# Altium PCB Copy of PCB1.PcbDoc
Units mil, origin at the board's own origin, x right, y up, seen from the top; angles counter-clockwise.
Board outline 3695 x 2500 mil, 4 copper layers (Top Layer, Mid Layer 1, Mid Layer 2, Bottom Layer), stack 64.961 mil thick; 77 components, 56 nets, 298 pads, 141 vias.
Unrouted connection lines stored in the file: 1.
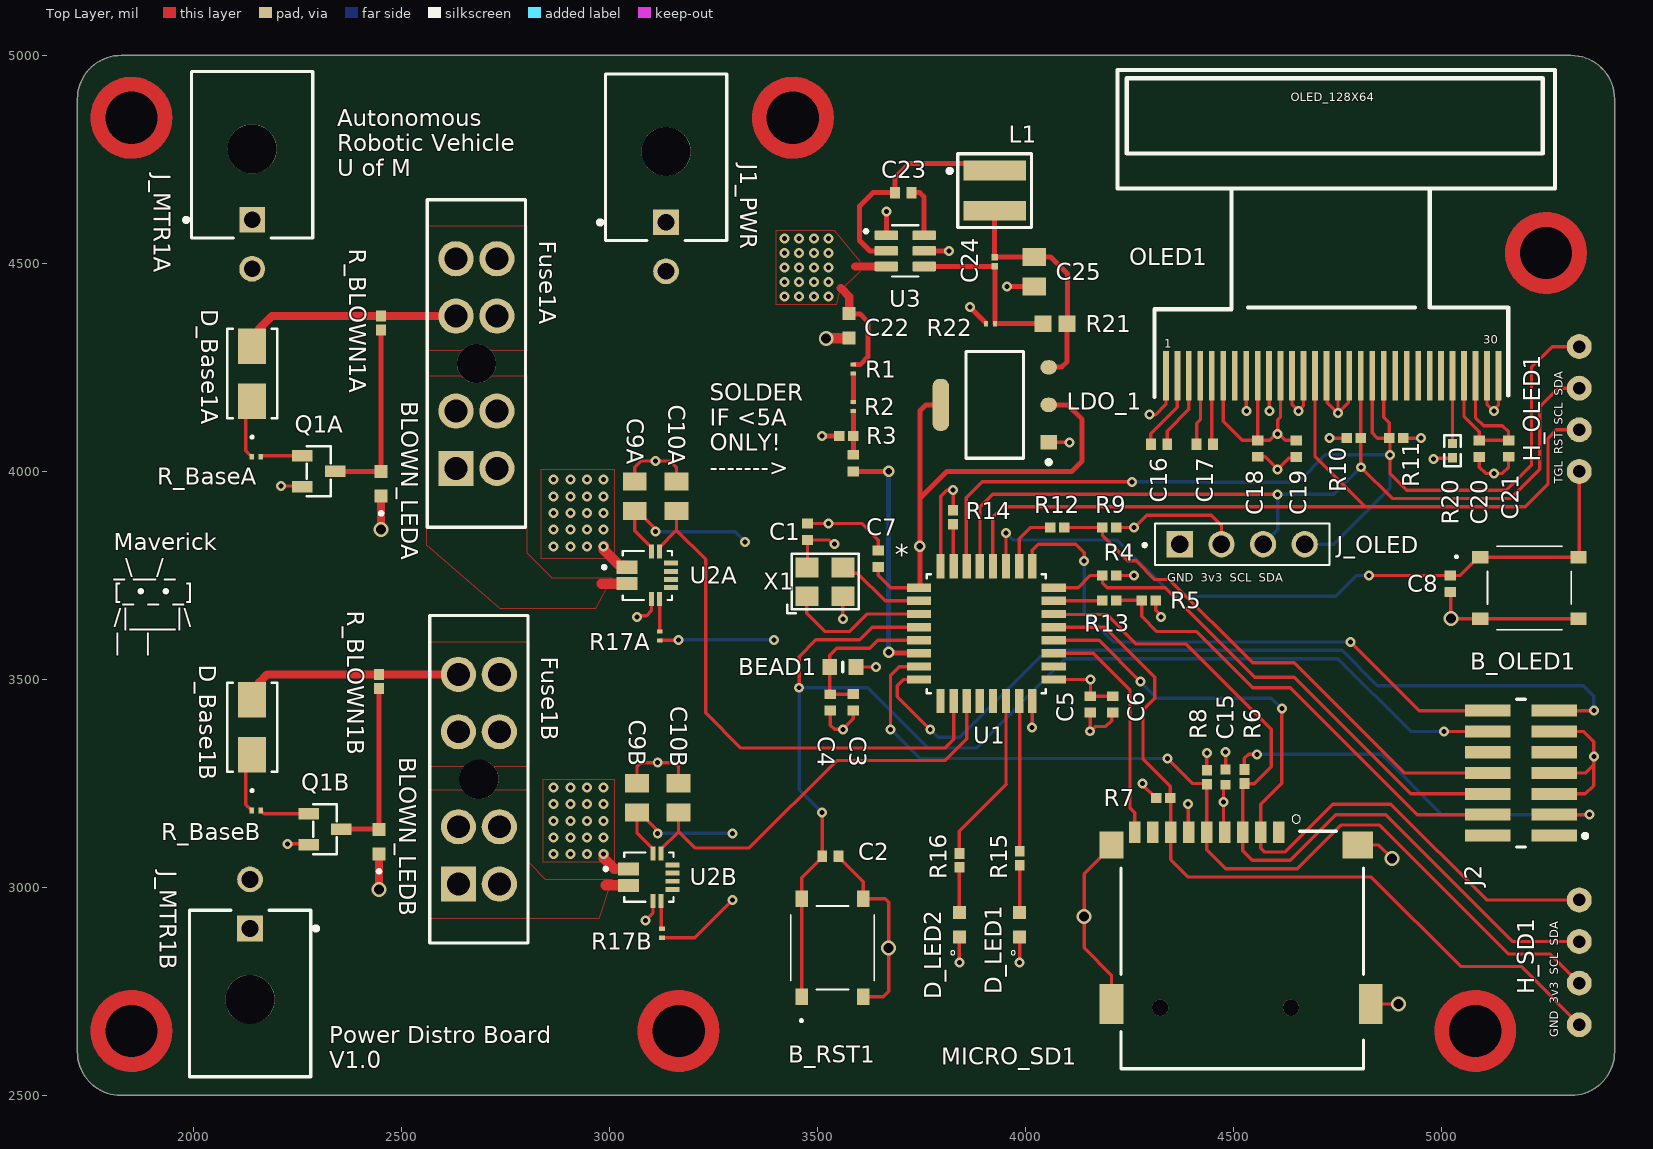
[diagram p0: Top Layer view]
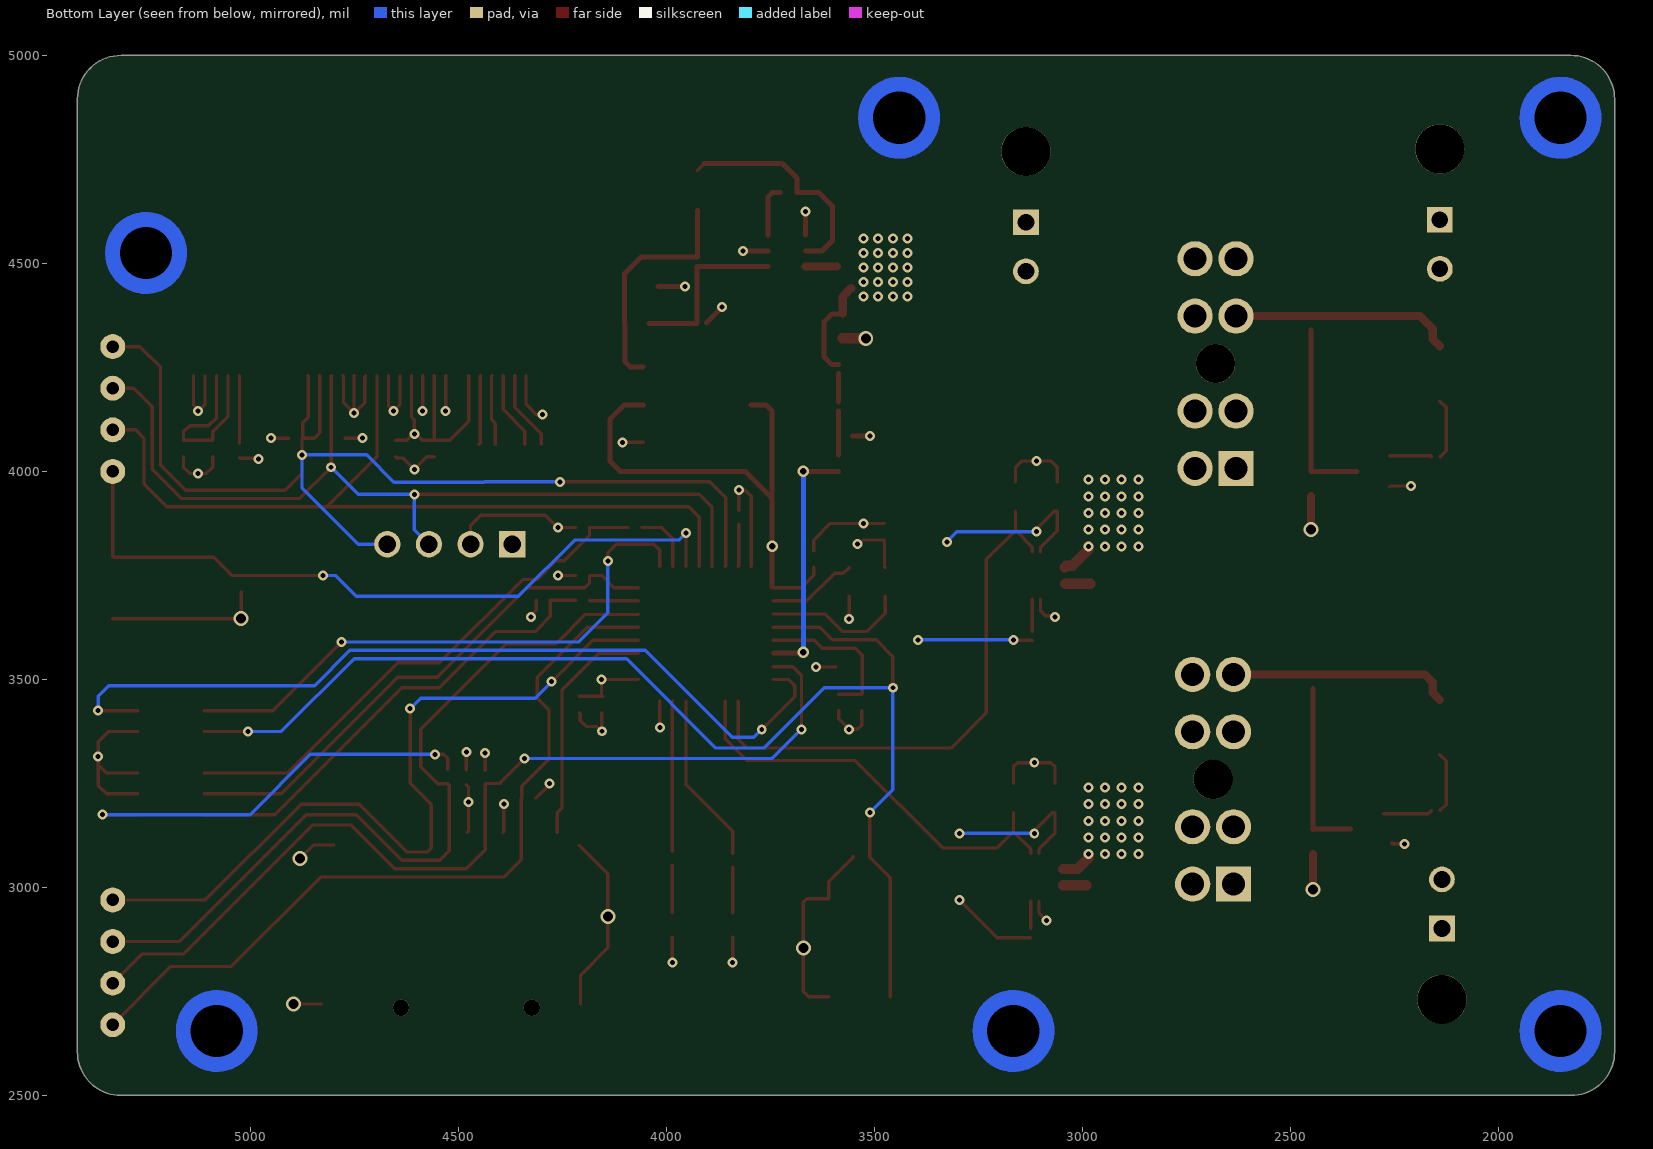
[diagram p1: Bottom Layer view, seen from below]
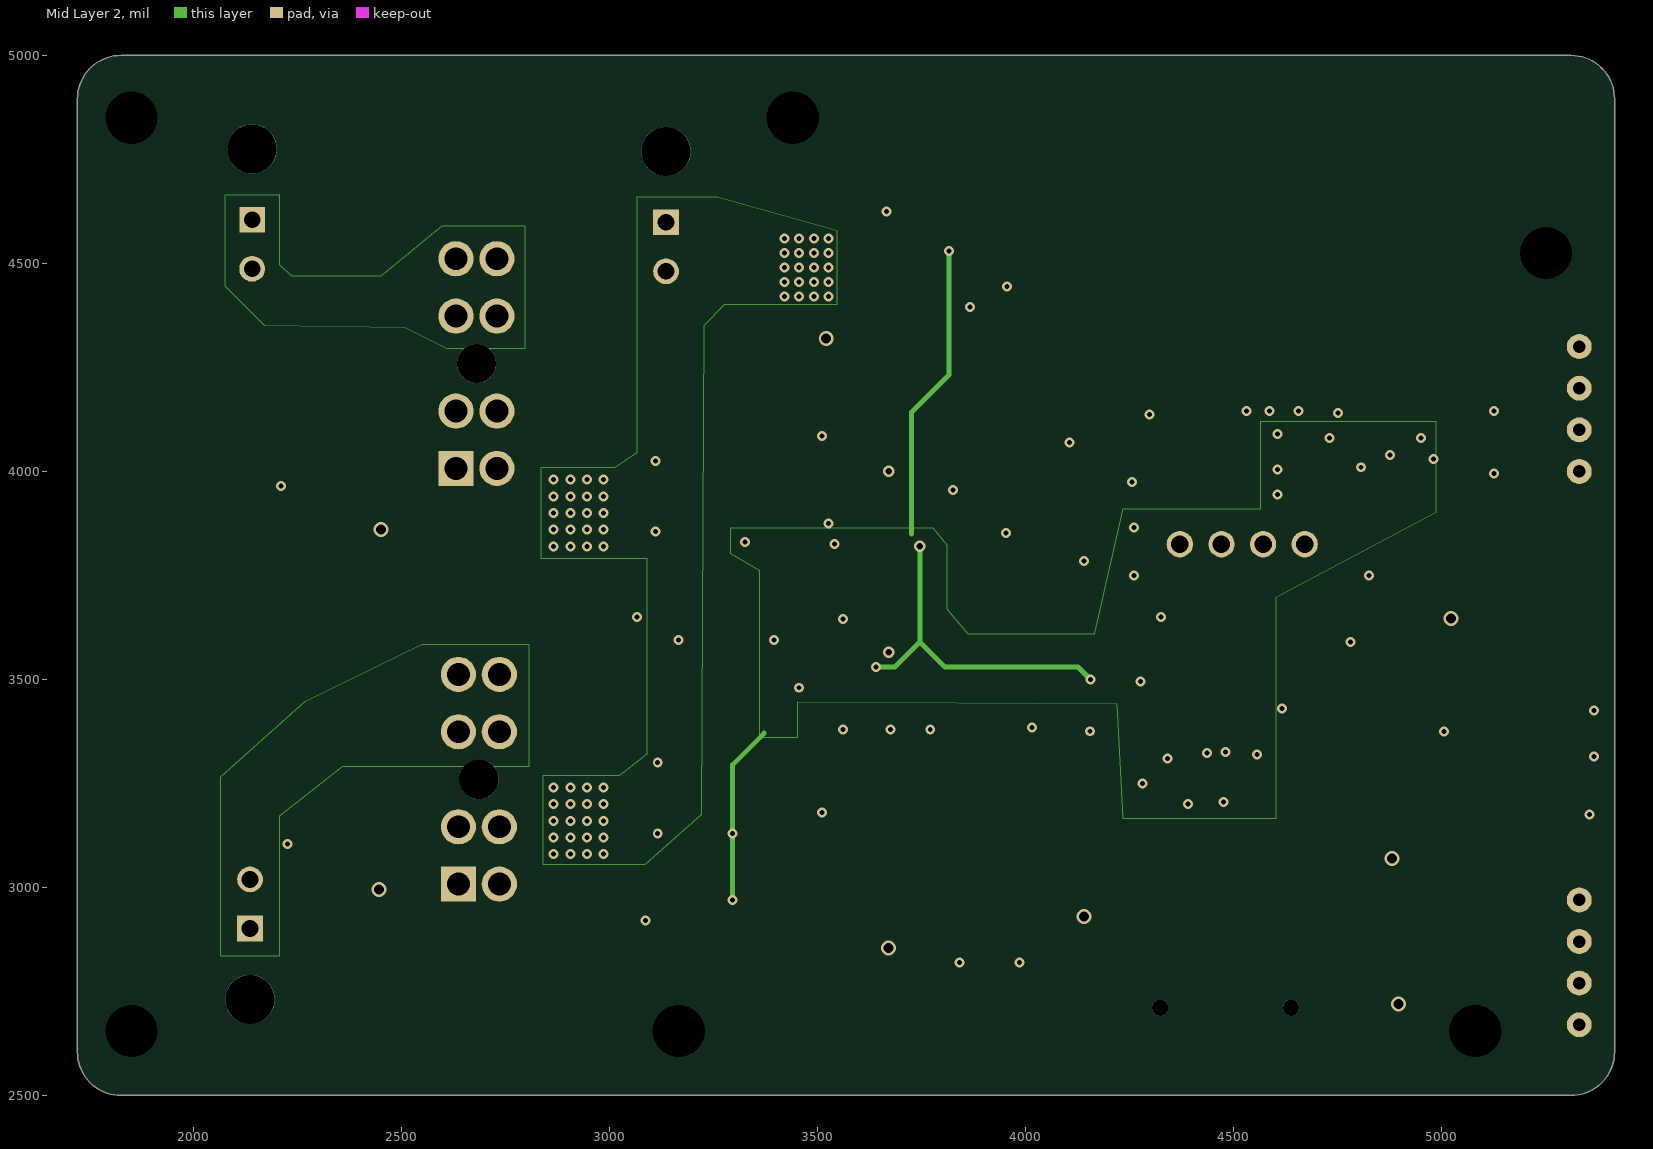
[diagram p2: Mid Layer 2]

## Layer stack, top to bottom
Top Solder: solder mask 0.5, Solder Resist, Dk 3.8
Top Layer: signal copper 2.9528
Dielectric 1: prepreg 3.937, 2313, Dk 4.05
Mid Layer 1: signal copper 0.689
Core: core 49.8031, FR-4, Dk 4.5
Mid Layer 2: signal copper 0.689
Dielectric 2: prepreg 3.937, 2313, Dk 4.05
Bottom Layer: signal copper 2.9528
Bottom Solder: solder mask 0.5, Solder Resist, Dk 3.8

## Board outline
1825,2500 cw(c1825,2605) 1720,2605 1720,4895 cw(c1825,4895) 1825,5000 5310,5000 cw(c5310,4895) 5415,4895 5415,2605 cw(c5310,2605) 5310,2500

## Design rules (kind name [scope] priority, off if disabled: settings)
AssemblyTestPointUsage [All] p0: scope1count=1 scope1_0_kind=Board scope1_0_value=Board scope2count=1 scope2_0_kind=Board scope2_0_value=Board commentlength=0
AssemblyTestpoint [All] p0: scope1count=1 scope1_0_kind=Board scope1_0_value=Board scope2count=1 scope2_0_kind=Board scope2_0_value=Board commentlength=0
BoardOutlineClearance [All] p0: scope1count=1 scope1_0_kind=Board scope1_0_value=Board scope2count=1 scope2_0_kind=Board scope2_0_value=Board commentlength=0 gap=11.81
BoardOutlineClearance [All] p1: gap=11.81 ignorepadtopadclearanceinfootprint=FALSE except(15.75: Arc-SplitBarrior Arc-SplitContinuation Track-SplitBarrior Track-SplitContinuation SMDPad-SplitBarrior SMDPad-SplitContinuation THPad-SplitBarrior THPad-SplitContinuation Via-SplitBarrior Via-SplitContinuation Fill-SplitBarrior Fill-SplitContinuation Poly-SplitBarrior Poly-SplitContinuation Region-SplitBarrior Region-SplitContinuation Text-SplitBarrior Text-SplitContinuation)
Clearance [All] p0: scope1count=1 scope1_0_kind=Board scope1_0_value=Board scope2count=1 scope2_0_kind=Board scope2_0_value=Board commentlength=0 gap=10
Clearance "Clearance Top Layer" [All] p0: scope1count=1 scope1_0_kind=Layer scope1_0_value=TOP scope2count=1 scope2_0_kind=Board scope2_0_value=Board commentlength=0 gap=8
Clearance "Clearance Bottom Layer" [All] p0: scope1count=1 scope1_0_kind=Layer scope1_0_value=BOTTOM scope2count=1 scope2_0_kind=Board scope2_0_value=Board commentlength=0 gap=8
Clearance "Clearance Same Nets" [All] p0: scope1count=1 scope1_0_kind=Board scope1_0_value=Board scope2count=1 scope2_0_kind=Board scope2_0_value=Board commentlength=0 gap=7.87
Clearance "Clearance Different Nets" [All] p0: scope1count=1 scope1_0_kind=Board scope1_0_value=Board scope2count=1 scope2_0_kind=Board scope2_0_value=Board commentlength=0 gap=7.87
Clearance [All] p1: gap=10 ignorepadtopadclearanceinfootprint=TRUE
Clearance "Clearance Different Nets" [All] p2: gap=7.87 ignorepadtopadclearanceinfootprint=FALSE except(3.5: Arc-Arc Arc-Track Arc-SMDPad Track-Track Track-SMDPad; 5: SMDPad-SMDPad SMDPad-Via THPad-Via Via-Via; 10: Arc-Via Arc-Text Track-Via Track-Text SMDPad-Text THPad-Text Via-Text Fill-Text Poly-Text Region-Text Text-Text; 19.68: THPad-THPad Via-Hole)
Clearance "Clearance Same Nets" [All] p3: gap=7.87 ignorepadtopadclearanceinfootprint=FALSE except(3.5: Arc-Arc Arc-Track Arc-SMDPad Track-Track Track-SMDPad SMDPad-SMDPad; 5: SMDPad-Via THPad-Via; 10: Arc-Via Arc-Text Track-Via Track-Text SMDPad-Text THPad-Text Via-Via Via-Text Fill-Text Poly-Text Region-Text Text-Text)
Clearance "Clearance Bottom Layer" [OnLayer('Bottom Layer')] p4: gap=8 ignorepadtopadclearanceinfootprint=TRUE except(10: Arc-Text Track-Text SMDPad-Text THPad-Text Via-Text Fill-Text Poly-Text Region-Text Text-Text)
Clearance "Clearance Top Layer" [OnLayer('Top Layer')] p5: gap=8 ignorepadtopadclearanceinfootprint=TRUE except(10: Arc-Text Track-Text SMDPad-Text THPad-Text Via-Text Fill-Text Poly-Text Region-Text Text-Text)
ComponentClearance [All] p0: scope1count=1 scope1_0_kind=Board scope1_0_value=Board scope2count=1 scope2_0_kind=Board scope2_0_value=Board commentlength=0 gap=10 collisioncheckmode=3
DiffPairsRouting [All] p0: scope1count=1 scope1_0_kind=Board scope1_0_value=Board scope2count=1 scope2_0_kind=Board scope2_0_value=Board commentlength=0
FabricationTestPointUsage [All] p0: scope1count=1 scope1_0_kind=Board scope1_0_value=Board scope2count=1 scope2_0_kind=Board scope2_0_value=Board commentlength=0 valid=0 allowmultiple=FALSE
FabricationTestpoint [All] p0: scope1count=1 scope1_0_kind=Board scope1_0_value=Board scope2count=1 scope2_0_kind=Board scope2_0_value=Board commentlength=0 side=3 testpointundercomponent=TRUE minsize=40 maxsize=100 preferedsize=60 minholesize=0 maxholesize=40 preferedholesize=32 testpointgrid=1
FanoutControl Fanout_Default [All] p0: scope1count=1 scope1_0_kind=Board scope1_0_value=Board scope2count=1 scope2_0_kind=Board scope2_0_value=Board commentlength=30 // Fanout_Default (Default Rule)
FanoutControl Fanout_Small [All] p0 off: scope1count=1 scope1_0_kind=Board scope1_0_value=Board scope2count=1 scope2_0_kind=Board scope2_0_value=Board commentlength=84 // Protel DXP Scope 1 Expression Was: (CompPinCount < 5)   Fanout_Small (Default Rule)
FanoutControl Fanout_SOIC [All] p0 off: scope1count=1 scope1_0_kind=Board scope1_0_value=Board scope2count=1 scope2_0_kind=Board scope2_0_value=Board commentlength=71 // Protel DXP Scope 1 Expression Was: IsSOIC   Fanout_SOIC (Default Rule)
FanoutControl Fanout_LCC [All] p0 off: scope1count=1 scope1_0_kind=Board scope1_0_value=Board scope2count=1 scope2_0_kind=Board scope2_0_value=Board commentlength=69 // Protel DXP Scope 1 Expression Was: IsLCC   Fanout_LCC (Default Rule)
FanoutControl Fanout_BGA [All] p0 off: scope1count=1 scope1_0_kind=Board scope1_0_value=Board scope2count=1 scope2_0_kind=Board scope2_0_value=Board commentlength=69 // Protel DXP Scope 1 Expression Was: IsBGA   Fanout_BGA (Default Rule)
Height [All] p0: scope1count=1 scope1_0_kind=Board scope1_0_value=Board scope2count=1 scope2_0_kind=Board scope2_0_value=Board commentlength=0
HoleSize [All] p0: scope1count=1 scope1_0_kind=Board scope1_0_value=Board scope2count=1 scope2_0_kind=Board scope2_0_value=Board commentlength=0 absolutevalues=TRUE maxlimit=248.03 minlimit=7.87 maxpercent=80.000 minpercent=20.000
HoleSize [All] p1: absolutevalues=TRUE maxlimit=248.03 minlimit=7.87 maxpercent=80.000 minpercent=20.000
HoleToHoleClearance [All] p0: scope1count=1 scope1_0_kind=Board scope1_0_value=Board scope2count=1 scope2_0_kind=Board scope2_0_value=Board commentlength=0
LayerPairs [All] p0: scope1count=1 scope1_0_kind=Board scope1_0_value=Board scope2count=1 scope2_0_kind=Board scope2_0_value=Board commentlength=0 enforce=TRUE
MinimumAnnularRing [All] p0: scope1count=1 scope1_0_kind=Board scope1_0_value=Board scope2count=1 scope2_0_kind=Board scope2_0_value=Board commentlength=0 minimumring=5.12
MinimumAnnularRing [All] p1: minimumring=5.12
MinimumSolderMaskSliver [All] p0: scope1count=1 scope1_0_kind=Board scope1_0_value=Board scope2count=1 scope2_0_kind=Board scope2_0_value=Board commentlength=0
MinimumSolderMaskSliver [All] p1: minsoldermaskwidth=3.94
NetAntennae [All] p0: scope1count=1 scope1_0_kind=Board scope1_0_value=Board scope2count=1 scope2_0_kind=Board scope2_0_value=Board commentlength=0
PasteMaskExpansion [All] p0: scope1count=1 scope1_0_kind=Board scope1_0_value=Board scope2count=1 scope2_0_kind=Board scope2_0_value=Board commentlength=0 expansion=0
PlaneClearance [All] p0: scope1count=1 scope1_0_kind=Board scope1_0_value=Board scope2count=1 scope2_0_kind=Board scope2_0_value=Board commentlength=0 clearance=25
PlaneClearance [All] p1: clearance=25
PlaneConnect [All] p0: scope1count=1 scope1_0_kind=Board scope1_0_value=Board scope2count=1 scope2_0_kind=Board scope2_0_value=Board commentlength=0 planeconnectstyle=Relief reliefexpansion=20 reliefentries=4 reliefconductorwidth=10 reliefairgap=10
PolygonConnect PolygonConnect_3 [All] p0 off: scope1count=1 scope1_0_kind=Board scope1_0_value=Board scope2count=1 scope2_0_kind=Board scope2_0_value=Board commentlength=69 connectstyle=Relief reliefconductorwidth=60 reliefentries=4 polygonreliefangle="90 Angle" // Protel DXP Scope 2 Expression Was: IsNamedPolygon('GND_L02_P000')
PolygonConnect PolygonConnect_2 [All] p0 off: scope1count=1 scope1_0_kind=Board scope1_0_value=Board scope2count=1 scope2_0_kind=Board scope2_0_value=Board commentlength=429 connectstyle=Relief reliefconductorwidth=10 reliefentries=4 polygonreliefangle="90 Angle" // Protel DXP Scope 1 Expression Was: (IsNamedPolygon('26V1_L01_P003') OR IsNamedPolygon('26V1_L01_P005') OR IsNamedPolygon('26V1_L01_P006') OR IsNamedPolygon('NETD_BASE1A_2_L01_P012') OR IsNamedPolygon('NETD_BASE1B_2_L01_P011') OR IsNamedPolygon('VMOTOR1_L01_P007') OR IsNamedPolygon('VMOTOR2_L01_P010')OR
IsNamedPolygon('26V1_L03_P004')OR
IsNamedPolygon('NETD_BASE1A_2_L03_P015')OR
IsNamedPolygon('NETD_BASE1B_2_L03_P014'))
PolygonConnect [All] p0: scope1count=1 scope1_0_kind=Board scope1_0_value=Board scope2count=1 scope2_0_kind=Board scope2_0_value=Board commentlength=0 connectstyle=Relief reliefconductorwidth=10 reliefentries=4 polygonreliefangle="90 Angle"
PolygonConnect PolygonConnect_1 [All] p0 off: scope1count=1 scope1_0_kind=Board scope1_0_value=Board scope2count=1 scope2_0_kind=Board scope2_0_value=Board commentlength=163 connectstyle=Direct reliefconductorwidth=20 reliefentries=4 polygonreliefangle="90 Angle" // Protel DXP Scope 1 Expression Was: (InComponent('J_MTR1A') OR InComponent('J_MTR1B') OR InComponent('J1_PWR')OR InComponent('Fuse1A') OR InComponent('Fuse1B'))
PolygonConnect PolygonConnect_3 [(InComponent('J_MTR1A') OR InComponent('J_MTR1B') OR InComponent('J1_PWR')OR InComponent('Fuse1A') OR InComponent('Fuse1B')) vs IsNamedPolygon('GND_L02_P000')] p1: thpad.connectstyle=Relief thpad.reliefconductorwidth=60 thpad.reliefentries=4 thpad.polygonreliefangle="90 Angle" thpad.airgapwidth=25 smdpad.connectstyle=Relief smdpad.reliefconductorwidth=10 smdpad.reliefentries=4 smdpad.polygonreliefangle="90 Angle" smdpad.airgapwidth=10 via.connectstyle=Relief via.reliefconductorwidth=10 via.reliefentries=4 via.polygonreliefangle="90 Angle" via.airgapwidth=10
PolygonConnect PolygonConnect_1 [(InComponent('J_MTR1A') OR InComponent('J_MTR1B') OR InComponent('J1_PWR')OR InComponent('Fuse1A') OR InComponent('Fuse1B'))] p2: thpad.connectstyle=Direct thpad.reliefconductorwidth=20 thpad.reliefentries=4 thpad.polygonreliefangle="90 Angle" thpad.airgapwidth=10 smdpad.connectstyle=Relief smdpad.reliefconductorwidth=20 smdpad.reliefentries=4 smdpad.polygonreliefangle="90 Angle" smdpad.airgapwidth=10 via.connectstyle=Relief via.reliefconductorwidth=20 via.reliefentries=4 via.polygonreliefangle="90 Angle" via.airgapwidth=10
PolygonConnect PolygonConnect_2 [(IsNamedPolygon('26V1_L01_P003') OR IsNamedPolygon('26V1_L01_P005') OR IsNamedPolygon('26V1_L01_P006') OR IsNamedPolygon('NETD_BASE1A_2_L01_P012') OR IsNamedPolygon('NETD_BASE1B_2_L01_P011') OR IsNamedPolygon('VMOTOR1_L01_P007') OR IsNamedPolygon('VMOTOR2_L01_P010')OR IsNamedPolygon('26V1_L03_P004')OR IsNamedPolygon('NETD_BASE1A_2_L03_P015')OR IsNamedPolygon('NETD_BASE1B_2_L03_P014'))] p3: thpad.connectstyle=Relief thpad.reliefconductorwidth=10 thpad.reliefentries=4 thpad.polygonreliefangle="90 Angle" thpad.airgapwidth=10 smdpad.connectstyle=Relief smdpad.reliefconductorwidth=10 smdpad.reliefentries=4 smdpad.polygonreliefangle="90 Angle" smdpad.airgapwidth=10 via.connectstyle=Direct via.reliefconductorwidth=10 via.reliefentries=4 via.polygonreliefangle="90 Angle" via.airgapwidth=10
PolygonConnect [All] p4: connectstyle=Relief reliefconductorwidth=10 reliefentries=4 polygonreliefangle="90 Angle" airgapwidth=10
RoutingCorners [All] p0: scope1count=1 scope1_0_kind=Board scope1_0_value=Board scope2count=1 scope2_0_kind=Board scope2_0_value=Board commentlength=0 cornerstyle=Round minsetback=100 maxsetback=100
RoutingCorners [All] p1: cornerstyle=Round minsetback=100 maxsetback=100
RoutingLayers [All] p0: scope1count=1 scope1_0_kind=Board scope1_0_value=Board scope2count=1 scope2_0_kind=Board scope2_0_value=Board commentlength=0 top layer=Automatic mid layer 1=Automatic mid layer 2=Automatic bottom layer=Automatic
RoutingPriority [All] p0: scope1count=1 scope1_0_kind=Board scope1_0_value=Board scope2count=1 scope2_0_kind=Board scope2_0_value=Board commentlength=0
RoutingTopology [All] p0: scope1count=1 scope1_0_kind=Board scope1_0_value=Board scope2count=1 scope2_0_kind=Board scope2_0_value=Board commentlength=0 topology=Shortest
RoutingVias [All] p0: scope1count=1 scope1_0_kind=Board scope1_0_value=Board scope2count=1 scope2_0_kind=Board scope2_0_value=Board commentlength=0 holewidth=19.68 width=39.37 viastyle="Through Hole" minholewidth=7.87 minwidth=13.78 maxholewidth=39.37 maxwidth=78.74
RoutingVias [All] p1: holewidth=19.68 width=39.37 viastyle="Through Hole" minholewidth=7.87 minwidth=13.78 maxholewidth=39.37 maxwidth=78.74
ShortCircuit [All] p0: scope1count=1 scope1_0_kind=Board scope1_0_value=Board scope2count=1 scope2_0_kind=Board scope2_0_value=Board commentlength=0 allowed=FALSE
SilkToBoardRegionClearance [All] p0: scope1count=1 scope1_0_kind=Board scope1_0_value=Board scope2count=1 scope2_0_kind=Board scope2_0_value=Board commentlength=0
SilkToSilkClearance [All] p0: scope1count=1 scope1_0_kind=Board scope1_0_value=Board scope2count=1 scope2_0_kind=Board scope2_0_value=Board commentlength=0
SilkToSilkClearance [All] p1: silktosilkclearance=3.94
SilkToSolderMaskClearance [All] p0 off: scope1count=1 scope1_0_kind=Board scope1_0_value=Board scope2count=1 scope2_0_kind=Board scope2_0_value=Board commentlength=44 // Protel DXP Scope 1 Expression Was: IsPad
SilkToSolderMaskClearance [IsPad] p1: minsilkscreentomaskgap=3.94 clearancetoexposedcopper=TRUE
SolderMaskExpansion [All] p0: scope1count=1 scope1_0_kind=Board scope1_0_value=Board scope2count=1 scope2_0_kind=Board scope2_0_value=Board commentlength=0 expansion=4
SolderMaskExpansion [All] p1: expansion=4 istentingtop=FALSE
UnRoutedNet [All] p0: scope1count=1 scope1_0_kind=Board scope1_0_value=Board scope2count=1 scope2_0_kind=Board scope2_0_value=Board commentlength=0
UnpouredPolygon [All] p0: scope1count=1 scope1_0_kind=Board scope1_0_value=Board scope2count=1 scope2_0_kind=Board scope2_0_value=Board commentlength=0
Width [All] p0: scope1count=1 scope1_0_kind=Board scope1_0_value=Board scope2count=1 scope2_0_kind=Board scope2_0_value=Board commentlength=0 maxlimit=100 minlimit=3.5 preferedwidth=15
Width [All] p1: maxlimit=100 minlimit=3.5 preferedwidth=15
24 further rules are at their usual default settings.

## Classes and differential pairs
channel class Fuse: F1 F2
channel class Ammeter: I1 I2
net class Vi_motor[1..2]: Vi_motor1 Vi_motor2
component class Power: J1_PWR R1 R2 R3
component class MCU: B_OLED1 B_RST1 BEAD1 C1 C2 C3 C4 C5 C6 C7 C8 D5 D6 D_LED1 D_LED2 H_OLED1 H_SD1 J_OLED R4 R5 R6 R7 R8 R9 R10 R11 R12 R13 R14 R15 R16 U1 X1
component class "Mass Storage": 3 C15 MICRO_SD1
component class I2: C9B C10B R17B U2B
component class I1: C9A C10A R17A U2A
component class F2: BLOWN_LEDB D1B D_Base1B Fuse1B J_MTR1B Q1B R_BaseB R_BLOWN1B
component class F1: BLOWN_LEDA D1A D_Base1A Fuse1A J_MTR1A Q1A R_BaseA R_BLOWN1A
component class Debugger: J2
component class Buck+LDO: C22 C23 C24 C25 L1 LDO_1 R21 R22 U3
component class "128x64 OLED": C16 C17 C18 C19 C20 C21 OLED1 R20

## Components (designator, comment, footprint, x,y, rotation, side; value= is the part's Value field where it differs from the comment)
B_OLED1 "Button" TS1187ABAB 5210,3720 r0 top
B_RST1 "Button" TS1187ABAB 3535,2855 r90 top
BEAD1 "GZ1608D601TF" BEADC1608X95N 3560,3530 r180 top
BLOWN_LEDA "KT-0603R" LED_KT-0603R 2450,3970 r90 top (schematic designator BLOWN_LED)
BLOWN_LEDB "KT-0603R" LED_KT-0603R 2445,3109.53 r90 top (schematic designator BLOWN_LED)
C1 "CL05B103KB5NNNC" CAP-0402 3475,3855 r270 top
C2 "CL05B104KB54PNC" CAP-0402 3530,3075 r180 top
C3 "CL05A105KA5NQNC" CAP-0402 3585,3445 r90 top
C4 "CL05B103KB5NNNC" CAP-0402 3530,3444.68 r90 top
C5 "CL05A475MP5NRNC" CAP-0402 4154.12,3439.84 r90 top
C6 "CL05B104KO5NNNC" CAP-0402 4209.12,3439.84 r90 top
C7 "CL05B104KO5NNNC" CAP-0402 3645,3790 r270 top
C8 "CL05B103KB5NNNC" CAP-0402 5020,3730 r90 top
C9A "CC0805KRX7R9BB104" CAP-0805 3060,3940 r270 top (schematic designator C9)
C9B "CC0805KRX7R9BB104" CAP-0805 3065,3215 r270 top (schematic designator C9)
C10A "CL21B102KBCNNNC" CAP-0805 3160,3940 r270 top (schematic designator C10)
C10B "CL21B102KBCNNNC" CAP-0805 3165,3215 r270 top (schematic designator C10)
C15 "0.1uF Ceramic Capacitor" CAPC1005X55N 4480,3265 r90 top
C16 "CL05A225MQ5NSNC" CAP-0402 4320,4065 r180 top
C17 "CL05A225MQ5NSNC" CAP-0402 4430,4065 r180 top
C18 "CL05B104KO5NNNC" CAP-0402 4556.89,4055 r90 top
C19 "CL05A106MQ5NUNC" CAP-0402 4650,4054.68 r90 top
C20 "CL05A106MQ5NUNC" CAP-0402 5090,4054.68 r90 top
C21 "CL05A106MQ5NUNC" CAP-0402 5160,4055 r90 top
C22 "885012106009" WCAP-CSGP_0603_L1.6W0.8H0.8_Reflow 3575,4350 r90 top
C23 "CL05B104KO5NNNC" CAP-0402 3705,4670 r180 top
C24 "CGA1A2C0G1E680J030BA" CAPC0603X33N 3925,4503.94 r90 top
C25 "CL21A476MQYNNNE" CAP-0805 4020,4480 r90 top
D_Base1A "Diode" M7_MDD 2140,4235 r90 top locked (schematic designator D_Base1)
D_Base1B "Diode" M7_MDD 2140,3385 r90 top locked (schematic designator D_Base1)
D_LED1 "LTST-C190GKT" LEDM1608X80 3985,2910 r90 top
D_LED2 "LTST-C190GKT" LEDM1608X80 3840,2910 r90 top
Fuse1A "178.6165.0002" FP-178_6165-MFG 2679.21,4259.17 r90 top (schematic designator Fuse1)
Fuse1B "178.6165.0002" FP-178_6165-MFG 2685,3260 r90 top (schematic designator Fuse1)
H_OLED1 "4-pin Header" "4-pin Header" 5330,4300 r180 top locked
H_SD1 "4-pin Header" "4-pin Header" 5330,2670 r0 top locked
J1_PWR "43045-0201" FP-43045-0201-MFG 3135,4755 r180 top
J2 "FTSH-107-01-L-DV-K" FP-FTSH-107-01-L-DV-K-MFG 5190,3275 r90 top
J_MTR1A "43045-0201" FP-43045-0201-MFG 2140,4761.1 r180 top (schematic designator J_MTR1)
J_MTR1B "43045-0201" FP-43045-0201-MFG 2135,2745 r0 top (schematic designator J_MTR1)
J_OLED "PPTC041LFBN-RC" SULLINS_PPTC041LFBN-RC 4520,3825 r0 top
L1 "74439325056" WE-XHMI_4040 3925,4675 r0 top
LDO_1 "AMS1117-3.3" FP-AMS1117-IPC_C 3925,4160 r180 top
MICRO_SD1 "TF-01A" TF-01A 4520,2850 r0 top
OLED1 "N096-2864KSWEG01-H30" OLED_0.96-30P-P0.70-12864 4736.1,4229.99 r0 top
Q1A "SS8050" SOT-23-3_L2.9-W1.3-P1.90-LS2.4-BR 2300,4000 r180 top (schematic designator Q1)
Q1B "SS8050" SOT-23-3_L2.9-W1.3-P1.90-LS2.4-BR 2315,3140 r180 top (schematic designator Q1)
R1 "0603WAF3003T5E" RES-0603 3585,4245.83 r90 top
R2 "0603WAF5103T5E" RES-0603 3585,4155.83 r90 top
R3 "0402WGF1003TCE" RES-0402 3568.27,4085 r0 top
R4 "0402WGF1002TCE" RES-0402 4200,3750 r0 top
R5 "0402WGF1002TCE" RES-0402 4295,3690 r0 top
R6 "0402WGF1002TCE" RES-0402 4525,3266.73 r90 top
R7 "0402WGF1002TCE" RES-0402 4330,3215 r180 top
R8 "0402WGF1002TCE" RES-0402 4435,3265 r90 top
R9 "0402WGF1002TCE" RES-0402 4200,3865 r0 top
R10 "0402WGF1002TCE" RES-0402 4788.27,4080 r180 top
R11 "0402WGF1002TCE" RES-0402 4890,4080 r0 top
R12 "0402WGF220JTCE" RES-0402 4075,3865 r0 top
R13 "0402WGF220JTCE" RES-0402 4200,3690 r180 top
R14 "0402WGF1002TCE" RES-0402 3825,3890 r270 top
R15 "0402WGF1000TCE" RES-0402 3985,3070 r270 top
R16 "0402WGF1000TCE" RES-0402 3840,3065 r270 top
R17A "0603WAF1001T5E" RES-0603 3120,3604.17 r270 top (schematic designator R17)
R17B "0603WAF1001T5E" RES-0603 3125,2890 r270 top (schematic designator R17)
R20 "390kΩ" R0402 5025,4050 r90 top
R21 "RC0603FR-07100KL" RESC1607X60N 4070,4355 r0 top
R22 "0603WAF1002T5E" RES-0603 3915,4355 r0 top
R_BaseA "0603WAF1002T5E" RES-0603 2150,4035 r180 top (schematic designator R_Base)
R_BaseB "0603WAF1002T5E" RES-0603 2150,3185 r180 top (schematic designator R_Base)
R_BLOWN1A "0402WGF1202TCE" RES-0402 2450,4356.73 r90 top (schematic designator R_BLOWN1)
R_BLOWN1B "0402WGF1202TCE" RES-0402 2445,3495 r90 top (schematic designator R_BLOWN1)
U1 "STM32L412KBT6" LQFP-32 3905,3610 r0 top
U2A "ACS711KEXLT-15AB-T" XDCR_ACS711KEXLT-15AB-T#1 3090,3750 r0 top (schematic designator U2)
U2B "ACS711KEXLT-15AB-T" XDCR_ACS711KEXLT-15AB-T#2 3093.62,3024.68 r0 top (schematic designator U2)
U3 "TPS561201DDCT" SOT95P280X110-6N 3710,4530 r0 top
X1 "32.768kHz" OSC-SMD_4P-L3.2-W2.5-BL 3516.69,3734.45 r0 top

## Footprints (in the part's own frame and the unit in brackets; to place one, negate y for a bottom-side part, rotate by r counter-clockwise, add the part's x,y. Pads: shape width x height; smd on the part's side, far side on the other; paste and mask are expansions set on the pad)
"4-pin Header" [mil]
  round 60 hole 30: 1(0,0) 2(0,100) 3(0,200) 4(0,300)
BEADC1608X95N [mm]
  rect 0.9x1 smd: 1(-0.8,0) 2(0.8,0)
  silkscreen extent 0,-0.3 0,0.3
CAP-0402 [mm]
  rect 0.6x0.7 smd: 1(-0.5,0) 2(0.5,0)
CAP-0805 [mm] "Chip Capacitor, 2-Leads, Body 2.00x1.25mm, IPC Medium Density"
  rect 1.1x1.45 smd: 1(-0.9,0) 2(0.9,0)
CAPC0603X33N [mm]
  rect 0.38x0.4 smd: 1(-0.281,0) 2(0.281,0)
CAPC1005X55N [mm]
  rect 0.6x0.62 smd: 1(-0.46,0) 2(0.46,0)
FP-178_6165-MFG [mm]
  round 2.15 hole 1.4 paste+0 mask+0: 1(-6.4,-1.25) 1(-2.9,-1.25) 1(-2.9,1.25) 2(2.9,-1.25) 2(2.9,1.25) 2(6.4,-1.25) 2(6.4,1.25)
  rect 2.15x2.15 hole 1.4 paste+0 mask+0: 1(-6.4,1.25)
  round 2.4 hole 2.4 unplated paste+0 mask+0: ""(0,0)
  silkscreen extent -10,-3 10,3
FP-43045-0201-MFG [mm]
  rect 1.57x1.57 hole 1.02 paste+0 mask+0: 1(0,3.965)
  round 1.57 hole 1.02 paste+0 mask+0: 2(0,6.965)
  round 3 hole 3 unplated paste+0 mask+0: ""(0,-0.355)
  silkscreen extent -3.7,-5.08 4.15,5.08
FP-AMS1117-IPC_C [mm]
  rect 1.004x0.872 smd paste+0 mask+0: 1(-3.295,2.29)
  rrect100% 1.004x0.872 smd paste+0 mask+0: 2(-3.295,0) 3(-3.295,-2.29)
  rrect87% 1.004x3.182 smd paste+0 mask+0: 4(3.295,0)
  silkscreen extent -3.42,-3.25 1.75,3.62
FP-FTSH-107-01-L-DV-K-MFG [mm]
  rect 0.74x2.79 smd paste+0 mask+0: 1(-3.81,-2.035) 2(-3.81,2.035) 3(-2.54,-2.035) 4(-2.54,2.035) 5(-1.27,-2.035) 6(-1.27,2.035) 7(0,-2.035) 8(0,2.035) 9(1.27,-2.035) 10(1.27,2.035) 11(2.54,-2.035) 12(2.54,2.035) 13(3.81,-2.035) 14(3.81,2.035)
  silkscreen extent -4.51,-4.04 4.51,0.27
LED_KT-0603R [mm]
  rect 0.8x0.8 smd: A(0.75,0) C(-0.75,0)
  silkscreen extent -1.9,-0.1 -1.7,0.1
LEDM1608X80 [mm]
  rect 0.8x0.8 smd: A(0.75,0) C(-0.75,0)
  silkscreen extent -1.83,0.27 -1.57,0.53
LQFP-32 [mil]
  rect 58x20 smd paste+0 mask+0: 1(-162,110.24) 2(-162,78.74) 3(-162,47.24) 4(-162,15.75) 5(-162,-15.75) 6(-162,-47.24) 7(-162,-78.74) 8(-162,-110.24) 17(162,-110.24) 18(162,-78.74) 19(162,-47.24) 20(162,-15.75) 21(162,15.75) 22(162,47.24) 23(162,78.74) 24(162,110.24)
  rect 20x58 smd paste+0 mask+0: 9(-110.24,-162) 10(-78.74,-162) 11(-47.24,-162) 12(-15.75,-162) 13(15.75,-162) 14(47.24,-162) 15(78.74,-162) 16(110.24,-162) 25(110.24,162) 26(78.74,162) 27(47.24,162) 28(15.75,162) 29(-15.75,162) 30(-47.24,162) 31(-78.74,162) 32(-110.24,162)
  silkscreen extent -143,-143 143,143
M7_MDD [mil]
  rect 85x67 smd paste+0 mask+0: 1(-66,0) 2(66,0)
  silkscreen extent -155,-60 108,60
OLED_0.96-30P-P0.70-12864 [mm]
  rect 0.351x3 smd: 1(-10.15,0.002) 2(-9.45,0) 3(-8.75,0) 4(-8.05,0) 5(-7.35,0) 6(-6.65,0) 7(-5.95,0) 8(-5.25,0) 9(-4.55,0) 10(-3.85,0) 11(-3.15,0) 12(-2.45,0) 13(-1.75,0) 14(-1.05,0) 15(-0.35,0) 16(0.35,0) 17(1.05,0) 18(1.75,0) 19(2.45,0) 20(3.15,0) 21(3.85,0) 22(4.55,0) 23(5.25,0) 24(5.95,0) 25(6.65,0) 26(7.35,0) 27(8.05,0) 28(8.75,-0.001) 29(9.45,-0.002) 30(10.15,-0.002)
  silkscreen extent -13.1,-1.3 13.6,18.67
OSC-SMD_4P-L3.2-W2.5-BL [mm]
  rect 1.4x1.2 smd: 1(-1.1,-0.875) 2(1.1,-0.875) 3(1.1,0.875) 4(-1.1,0.875)
  silkscreen extent -2.29,-1.9 2.07,1.72
R0402 [mm]
  rect 0.566x0.54 smd paste-100 mask+0: 1(-0.433,0) 2(0.433,0)
  silkscreen extent -0.94,-0.5 0.94,0.5
RES-0402 [mm] "Chip Resistor, 2-Leads, Body 1.00x0.50mm, IPC Medium Density"
  rect 0.65x0.6 smd: 1(-0.425,0) 2(0.425,0)
RES-0603 [mm]
  rect 0.25x0.35 smd: 1(-0.275,0) 2(0.275,0)
RESC1607X60N [mm]
  rect 1.04x1.02 smd: 1(-0.735,0) 2(0.735,0)
SOT95P280X110-6N [mm]
  rrect25% 1.45x0.59 smd paste+0 mask+0: 1(-1.155,0.95) 2(-1.155,0) 3(-1.155,-0.95) 4(1.155,-0.95) 5(1.155,0) 6(1.155,0.95)
  silkscreen extent -2.5,-1.57 0.8,1.57
SOT-23-3_L2.9-W1.3-P1.90-LS2.4-BR [mm]
  rect 1.25x0.7 smd: 1(1,-0.95) 2(1,0.95) 3(-1,0)
  silkscreen extent -0.73,-1.53 0.73,1.53
SULLINS_PPTC041LFBN-RC [mm]
  rect 1.605x1.605 / inner round 1.605 / far side rect 1.605x1.605 hole 1.07: 1(-3.81,0)
  round 1.605 hole 1.07: 2(-1.27,0) 3(1.27,0) 4(3.81,0)
  silkscreen extent -6.06,-1.27 5.33,1.27
TF-01A [mm]
  rect 0.7x1.3 smd: 1(2.23,7.174) 2(1.13,7.174) 3(0.03,7.174) 4(-1.07,7.174) 5(-2.17,7.174) 6(-3.27,7.174) 7(-4.37,7.174) 8(-5.47,7.174) CD1(-6.57,7.174)
  rect 1.448x1.651 smd: MP1(-7.989,6.4)
  rect 1.448x2.438 smd: MP2(-7.989,-3.3) MP3(7.836,-3.3)
  rect 1.854x1.651 smd: MP4(7.061,6.4)
  round 1 hole 1 unplated: ""(-5.004,-3.531) ""(2.972,-3.531)
  silkscreen extent -7.4,-7.26 7.4,8.24
TS1187ABAB [mm]
  rect 1x0.75 smd: A1(-3,1.875) B1(3,1.875) C1(-3,-1.875) D1(3,-1.875)
  silkscreen extent -4.5,-2.55 2.55,2.55
WCAP-CSGP_0603_L1.6W0.8H0.8_Reflow [mm] "Ceramic Capacitors, body 1.6x0.8mm"
  rect 0.8x0.8 smd: 1(-0.75,0) 2(0.75,0)
WE-XHMI_4040 [mm] "SMD Power Inductor, body 4.30 x 4.30 mm"
  rect 3.8x1.2 smd: 1(0,1.225) 2(0,-1.225)
  silkscreen extent -2.87,-2.25 2.25,2.25
XDCR_ACS711KEXLT-15AB-T#1 [mm]
  rect 1.27x0.8 smd mask+0: 1(-1.235,0.5) 3(-1.235,-0.5)
  rect 0.3x0.85 smd mask+0: 5(0.25,-1.45) 6(0.75,-1.45) 11(0.75,1.45) 12(0.25,1.45)
  rect 0.85x0.3 smd mask+0: 7(1.45,-0.75) 8(1.45,-0.25) 9(1.45,0.25) 10(1.45,0.75)
  silkscreen extent -2.73,-1.5 1.5,1.5
XDCR_ACS711KEXLT-15AB-T#2 [mm]
  rect 1.27x0.8 smd mask+0: 1(-1.235,0.5) 3(-1.235,-0.5)
  rect 0.3x0.85 smd mask+0.05: 5(0.25,-1.45) 6(0.75,-1.45) 11(0.75,1.45) 12(0.25,1.45)
  rect 0.85x0.3 smd mask+0.05: 7(1.45,-0.75) 8(1.45,-0.25) 9(1.45,0.25) 10(1.45,0.75)
  silkscreen extent -2.73,-1.5 1.5,1.5

## Part data
B_OLED1 B_RST1: library part TS-1187A-B-A-B
BEAD1: "Ferrite Bead"
BLOWN_LEDA BLOWN_LEDB: "Red 0603 Light Emitting Diodes"
C1 C4 C8: "Capacitor, Ceramic (MLCC), 10nF, ±10%, 50V, X7R, ±10%, SMD 0402"
C2: "Capacitor, Ceramic (MLCC), 100nF, ±10%, 50V, X7R, ±10%, SMD 0402"
C3: "Capacitor, Ceramic (MLCC), 1uF, ±10%, 25V, X5R, ±10%, SMD 0402"
C5: "Capacitor, Ceramic (MLCC), 4.7uF, ±20%, 10V, X5R, ±20%, SMD 0402"
C6 C7 C18 C23: "Capacitor, Ceramic (MLCC), 100nF, ±10%, 16V, X7R, ±10%, SMD 0402"
C9A C9B: "Capacitor, Ceramic (MLCC), 100nF, ±10%, 50V, X7R, ±10%, SMD 0805"
C10A C10B: "Capacitor, Ceramic (MLCC), 1nF, ±10%, 50V, X7R, ±10%, SMD 0805"
C15: library part CL05B104KO5NNNC
C16 C17: "Capacitor, Ceramic (MLCC), 2.2uF, ±20%, 6.3V, X5R, ±20%, SMD 0402"
C19 C20 C21: "Capacitor, Ceramic (MLCC), 10uF, ±20%, 6.3V, X5R, ±20%, SMD 0402"
C22: library part CMP-03913-53914714-2, "Cap Cer 0.68UF 10V X5R 0603"
C24: "68 pF ±5% 25V Ceramic Capacitor C0G, NP0 0201 (0603 Metric)"
C25: "Capacitor, Ceramic (MLCC), 47uF, ±20%, 6.3V, X5R, ±20%, SMD 0805"
D_Base1A D_Base1B: library part M7, "1A Independent Type 1kV 1.1V@1A SMA(DO-214AC) Diodes - General Purpose ROHS"
Fuse1A Fuse1B: library part CMP-08604-000022-1, "FUSE HOLDER BLADE 80V PCB"
H_OLED1 H_SD1: "4-pin Header 0.1mm pitch"
J1_PWR J_MTR1A J_MTR1B: library part CMP-04776-000998-1, "CONN HEADER R/A 2POS"
J2: library part CMP-02766-001412-1, "CONN HEADER SMD 14POS 1.27MM"
J_OLED: "4 Position Header Connector 0.100 (2.54mm) Through Hole Tin"
L1: library part CMP-03913-148605660-1, "Power Inductor, 5.6UH, Shielded, 5.1A Rohs Compliant: Yes"
LDO_1: library part CMP-209535-000001-1, "LDO Voltage Regulators 1A, 3.3V"
MICRO_SD1: "Standard Card Edge Connectors"
Q1A Q1B: library part SS8050(RANGE:200-350)_C2150, "BJT NPN"
R1: "Resistor, 300kO, ±1%, 100mW, 75V, ±100ppm/?, -55?~+155?, SMD 0603"
R2: "Resistor, 510kO, ±1%, 100mW, 75V, ±100ppm/?, -55?~+155?, SMD 0603"
R3: "Resistor, 100kO, ±1%, 62.5mW, 50V, ±100ppm/?, -55?~+155?, SMD 0402"
R4 R5 R6 R7 R8 R9 R10 R11 R14: "Resistor, 10kO, ±1%, 62.5mW, 50V, ±100ppm/?, -55?~+155?, SMD 0402"
R12 R13: "Resistor, 22O, ±1%, 62.5mW, 50V, ±200ppm/?, -55?~+155?, SMD 0402"
R15 R16: "Resistor, 100O, ±1%, 62.5mW, 50V, ±200ppm/?, -55?~+155?, SMD 0402"
R17A R17B: "Resistor, 1kO, ±1%, 100mW, 75V, ±100ppm/?, -55?~+155?, SMD 0603"
R20: library part 0402WGF3903TCE, "390k Resistor"
R21: "100 kOhms ±1% 0.1W, 1/10W Chip Resistor 0603 (1608 Metric) Moisture Resistant Thick Film"
R22: "Resistor, 13.7kO, ±1%, 100mW, 75V, ±100ppm/?, -55?~+155?, SMD 0603"
R_BaseA R_BaseB: "Resistor, 10kO, ±1%, 100mW, 75V, ±100ppm/?, -55?~+155?, SMD 0603"
R_BLOWN1A R_BLOWN1B: "Resistor, 12kO, ±1%, 62.5mW, 50V, ±100ppm/?, -55?~+155?, SMD 0402"
U1: "No Description Available"
U2A U2B: "Current Sensor 31A 1 Channel Hall Effect, Open Loop Bidirectional 12-PowerWFQFN"
U3: "4.5V to 17V Input, 1A Synchronous Step-Down Voltage Regulator in 6-pin SOT-23"
X1: library part SX3M32.768KM20F30TNN

## Free pads (board coordinates)
  rect 27.56x23.62 smd: 3(3585,4000) 3(3585,4040)
  round 0 hole 125.98 unplated paste+0 mask+0: 4(1850,2655) 4(1850,4850) 4(3165,2655) 4(3440,4850) 4(5080,2655) 4(5250,4525)

## Via types
v1: diameter 24, hole 12, Top Layer to Bottom Layer, 130 vias
v2: diameter 36, hole 24, Top Layer to Bottom Layer, 8 vias
v3: diameter 28, hole 16, Top Layer to Bottom Layer, 3 vias

## Nets (pads, with @x,y where several pads share a name; then routed paths per layer and width w, separated by ;. In a path a pad name is that pad's centre, name@x,y a point inside that pad or via, vN(x,y) a via of type N, cw(c..) or ccw(c..) an arc to the next point about the centre after c; other vN are vias at no path point)
3V3: C1.2 C9A.2 C9B.2 C15.1 C18.2 C19.2 J2.3 J_OLED.2 MICRO_SD1.4 OLED1.6 OLED1.9 OLED1.11 R4.2 R5.2 R6.2 R7.2 R8.2 R9.2 R10.2 R11.2 R17A.2 R17B.2 U2A.12 U2B.12 U3.5 X1.4 | length 4934.4
  Top Layer w8: U2A.12 3099.84,3817.91 3060,3857.76 C9A.2 3066.89,3904.57 3106.94,3864.52 3106.94,3858.06 v1(3110,3855) ; U2B.12 3103.46,3092.6 3065,3131.06 C9B.2 3071.89,3179.57 3111.94,3139.52 3111.94,3133.06 v1(3115,3130) ; R17A.2 3120.83,3594.17 3164.17,3594.17 v1(3165,3595) ; R17B.2 3204.17,2879.17 v1(3295,2970) ; X1.4 3475,3770.52 C1.2 ; C1.2@3475.16,3835.16 3525.51,3835.16 3535.67,3825 v1(3540,3825) ; R4.2 v1(4260,3750) ; R9.2 v1(4260,3865) 4290,3895 4445.31,3895 4470,3870.31 J_OLED.2 ; v1(4280,3250) 4280,3247.28 4312.28,3215 R7.2 ; R5.2 4311.73,3666.19 4325,3652.92 v1(4325,3650) ; R8.2 v1(4435,3322.72) ; OLED1.6 4474.29,4120.71 4520.31,4074.68 C18.2 4586.06,4074.68 4601.06,4089.68 v1(4605,4089.68) ; MICRO_SD1.4 4475,3135.3 4475,3241.89 C15.1 ; R6.2 4525,3310 4535,3320 v1(4555,3320) ; C18.2@4556.97,4074.76 OLED1.9 ; OLED1.11 4612.08,4131.41 4605,4124.33 v1(4605,4089.68) ; C19.2 4649.84,4074.53 4623.78,4074.53 4608.63,4089.68 v1(4605,4089.68) ; v1(4730,4080) R10.2 ; R11.2 v1(4950,4080) ; J2.3 v1(5355,3175)
  Top Layer w12: U3.5 v1(3815,4530)
  Mid Layer 2 w12: v1(3295,2970) v1(3295,3130) 3295,3295 3370.84,3370.84 ; 3725,3850 3725,4142.29 3815,4232.29 v1(3815,4530)
  Bottom Layer w8: v1(3110,3855) 3301.06,3855 3325,3831.06 v1(3325,3830) ; v1(3115,3130) v1(3295,3130) ; v1(3165,3595) v1(3395,3595) ; v1(4555,3320) 4855,3320 5000,3175 v1(5355,3175)
  other v1: 4475,3205
26V1: C22.2 J1_PWR.1 R1.2 U2A.1 U2B.1 U3.3 | length 487.5
  Top Layer w12: C22.2 3576.25,4378.28 3601.72,4378.28 3620,4360 3620,4275 3601.65,4256.65 R1.2
  Top Layer w20: 3555,4440.47 3575,4420.47 C22.2 ; 3590,4492.6 U3.3 U3.3@3664.71,4492.6
  Top Layer w25: v1(2985,3080) 2985,3070 3010.63,3044.37 U2B.1 ; v1(2985,3820) 2985,3811.38 3023.45,3772.93 3038.13,3772.93 U2A.1
  other v1: 2865,3080 2905,3080 2945,3080 2865,3120 2905,3120 2945,3120 2985,3120 2865,3160 2905,3160 2945,3160 2985,3160 2865,3200 2905,3200 2945,3200 2985,3200 2865,3240 2905,3240 2945,3240 2985,3240 2865,3820 2905,3820 2945,3820 2865,3860 2905,3860 2945,3860 2985,3860 2865,3900 2905,3900 2945,3900 2985,3900 2865,3940 2905,3940 2945,3940 2985,3940 2865,3980 2905,3980 2945,3980 2985,3980 3420,4420 3455,4420 3490,4420 3525,4420 3420,4455 3455,4455 3490,4455 3525,4455 3420,4490 3455,4490 3490,4490 3525,4490 3420,4525 3455,4525 3490,4525 3525,4525 3420,4560 3455,4560 3490,4560 3525,4560
\C\S\: H_SD1.4 MICRO_SD1.2 U1.20 | length 1884.7
  Top Layer w8: U1.20 4175.75,3594.25 v1(4275,3495) ; v1(4615,3430) 4615,3250 4564.48,3199.48 MICRO_SD1.2 4564.48,3094.69 4574.17,3085 4622.37,3085 4737.37,3200 4877.37,3200 5107.37,2970 H_SD1.4
  Bottom Layer w8: v1(4275,3495) 4315,3455 4590,3455 v1(4615,3430)
ADC1_IN8: U1.9
AVDD: BEAD1.2 C3.2 C4.2 U1.5 | length 379.2
  Top Layer w8: C3.2 3584.84,3464.53 3530.16,3464.53 C4.2 3528.5,3465.87 BEAD1.2 3528.5,3558.5 3545,3575 3625,3575 3644.25,3594.25 U1.5
BOOT0: R14.2 U1.31 | length 101.8
  Top Layer w8: R14.2 3825,3773.26 U1.31
CardDetect: MICRO_SD1.CD1 U1.19 | length 566.6
  Top Layer w8: U1.19 4162.24,3562.76 4250,3475 4250,3191.33 4261.33,3180 MICRO_SD1.CD1
GND: B_OLED1.C1 B_OLED1.D1 B_RST1.C1 B_RST1.D1 BLOWN_LEDA.C BLOWN_LEDB.C C1.1 C2.1 C3.1 C4.1 C5.1 C6.1 C7.1 C8.1 C9A.1 C9B.1 C10A.1 C10B.1 C15.2 C18.1 C19.1 C20.1 C21.1 C22.1 C25.1 D_LED1.C D_LED2.C J1_PWR.2 J2.5 J2.7 J2.11 J_MTR1A.2 J_MTR1B.2 J_OLED.1 LDO_1.1 MICRO_SD1.6 MICRO_SD1.MP1 MICRO_SD1.MP2 MICRO_SD1.MP3 MICRO_SD1.MP4 OLED1.1 OLED1.8 OLED1.10 OLED1.12 OLED1.13 OLED1.15 OLED1.16 OLED1.17 OLED1.29 OLED1.30 Q1A.2 Q1B.2 R3.1 R14.1 R20.1 R22.1 U1.16 U1.32 U2A.5 U2B.5 U3.1 X1.2 | length 5235
  Top Layer w8: v1(2210,3965) 2258.23,3965 Q1A.2 ; v1(2225,3105) 2255.02,3105 2255.63,3105.61 Q1B.2@2255.63,3107.6 ; C9A.1 3060,4010 3075.06,4025.06 3089.94,4025.06 3090,4025 v1(3110,4025) 3145,4025 3160,4010 C10A.1 ; C9B.1 3065,3290 3075,3300 v1(3115,3300) 3155,3300 3165,3290 C10B.1 ; v1(3065,3650) 3068.06,3653.06 3088.06,3653.06 3099.84,3664.84 U2A.5 ; v1(3085,2920) 3103.46,2938.46 U2B.5 ; C1.1 3475.16,3874.84 3524.84,3874.84 v1(3525,3875) 3605,3875 3645,3835 C7.1 ; C4.1 3530,3390 3540,3380 v1(3560,3380) 3585,3405 C3.1 ; C2.1 3549.68,3073.03 3608.82,3013.9 B_RST1.D1 3661.89,2973.11 3670,2965 v2(3670,2855) 3670,2750 3656.89,2736.89 B_RST1.C1 ; v1(3560,3645) X1.2 ; U1.32 3795,3772.24 3795,3940 3809.46,3954.46 3824.46,3954.46 v1(3825,3955) R14.1 ; v1(3840,2820) D_LED2.C ; v1(3985,2820) D_LED1.C ; v1(4015,3385) 4015.12,3385.12 4015.12,3447.88 U1.16 ; C25.1@4019.57,4445 C25.1 ; LDO_1.1 4054.88,4070 v1(4105,4070) ; C5.1@4154.56,3419.72 v1(4154.56,3375.44) 4155.8,3375.44 4167.25,3386.88 4191.88,3386.88 4206.03,3401.03 4206.03,3417.07 C6.1 ; MICRO_SD1.MP2 4205.49,2789.51 4140,2855 v2(4140,2930) 4140,3032.48 MICRO_SD1.MP1@4208.49,3100.97 ; v1(4296.47,4136.47) 4311.47,4136.47 4336.49,4161.49 OLED1.1 ; v1(4390,3200) 4390,3133.69 MICRO_SD1.6 ; C15.2 v1(4480,3325) ; OLED1.8 4529.7,4229.7 4529.7,4145.3 v1(4530,4145) ; C18.1 4557.01,4035.2 4574.8,4035.2 v1(4605,4005) 4632.09,4032.09 4647.09,4032.09 C19.1 ; OLED1.10 4584.77,4229.77 4584.77,4145.23 v1(4585,4145) ; OLED1.12 4639.64,4160.36 v1(4655,4145) 4655,4146.74 4667.2,4158.94 OLED1.13 ; OLED1.15 4724.62,4227.7 4724.62,4165.38 v1@4749.94,4140.06 ; OLED1.16 4749.94,4229.94 v1@4749.94,4140.06 ; OLED1.17 4775.26,4227.82 4775.26,4165.26 v1(4750,4140) v1@4749.94,4140.06 ; MICRO_SD1.MP4 4848.03,3101.97 v2(4880,3070) ; MICRO_SD1.MP3@4828.59,2720 v2(4895,2720) ; v1(4980,4030) 4981.48,4031.48 5023.52,4031.48 R20.1 ; C8.1 5021.18,3709.13 v2(5021.18,3646.18) B_OLED1.C1 B_OLED1.D1 B_OLED1.D1@5330,3646.18 ; C20.1 5090,4010 5105,3995 v1(5125,3995) 5145,3995 5160,4010 C21.1 ; OLED1.29 5108.15,4161.85 v1(5125,4145) 5125,4148.14 5135.71,4158.85 OLED1.30 ; J2.5 5345,3225 5365,3245 5365,3295 ; J2.7 5345,3275 5365,3295 ; J2.11 5340,3375 5365,3350 v1(5365,3315) 5365,3295
  Top Layer w10: U3.1 U3.1@3665,4567.87
  Top Layer w12: v1(3510,4085) R3.1 ; U3.1@3665,4567.87 v1(3665,4625) ; v1(3865,4395) R22.1@3903.19,4356.81 ; v1(3955,4445) C25.1@4019.57,4445
  Top Layer w20: v2(2445,2995) BLOWN_LEDB.C ; v2(2450,3860) BLOWN_LEDA.C
  Top Layer w25: v2(3520,4320) 3520.24,4320.24 3574.76,4320.24 C22.1
I2C1_SCL: H_OLED1.2 J_OLED.3 OLED1.18 R10.1 U1.29 | length 2205.9
  Top Layer w8: U1.29 3889.63,3772.37 3889.63,3914.63 3920,3945 v1(4605,3945) ; OLED1.18 R10.1 v1(4805,4010) 4880,3935 5165,3935 5235,4005 5235,4155 5280,4200 H_OLED1.2
  Bottom Layer w8: J_OLED.3 4605,3860 v1(4605,3945) 4740,3945 v1(4805,4010)
I2C1_SDA: H_OLED1.1 J_OLED.4 OLED1.19 OLED1.20 R11.1 U1.30 | length 2745.1
  Top Layer w8: U1.30 3856.38,3773.38 3856.38,3936.38 3895,3975 v1(4255,3975) ; OLED1.19 4832.56,4092.44 4845,4080 R11.1 ; OLED1.20 4860.12,4130.12 4860,4130 4873.27,4116.73 R11.1 ; H_OLED1.1 5265,4300 5215,4250 5215,4015 5155,3955 4915,3955 4875,3995 v1(4875,4040) 4875,4078.27 R11.1
  Bottom Layer w8: v1(4255,3975) 4436.08,3975 4437.08,3974 4654,3974 4720,4040 4871.94,4040 v1(4875,4040) 4875,3960 4740,3825 J_OLED.4
LED1: R15.1 U1.15 | length 361.8
  Top Layer w8: U1.15 3985,3446.74 R15.1
LED2: R16.1 U1.14 | length 413
  Top Layer w8: R16.1 3840,3135 3952.5,3247.5 3952.24,3247.76 U1.14
LSE_EN: U1.3 X1.1 | length 346.3
  Top Layer w8: X1.1 3473.38,3659.13 3517.51,3615 3575,3615 3617.24,3657.24 U1.3
LSE_Out: U1.2 X1.3 | length 216.2
  Top Layer w8: X1.3 3573.77,3755.13 3594.87,3755.13 3661.26,3688.74 U1.2
MCU_VCP_RX: J2.14 U1.25 | length 1389.6
  Top Layer w8: U1.25 4015.24,3810.24 4030,3825 4120,3825 4140,3805 v1(4140,3785) ; v1(4780,3590) 4945,3425 J2.14
  Bottom Layer w8: v1(4140,3785) 4140,3660 4210,3590 v1(4780,3590)
MCU_VCP_TX: J2.13 U1.8 | length 2062.4
  Top Layer w8: U1.8 3704.76,3499.76 3690.33,3485.33 3690.33,3458.79 3769.12,3380 v1(3770,3380) ; J2.13 v1(5365,3425)
  Bottom Layer w8: v1(3770,3380) 3789,3361 3841,3361 4050,3570 4760,3570 4845,3485 5340,3485 5365,3460 v1(5365,3425)
NetBLOWN_LEDA_A: BLOWN_LEDA.A Q1A.3 R_BLOWN1A.1 | length 451.3
  Top Layer w8: BLOWN_LEDA.A@2449.53,4000 BLOWN_LEDA.A
  Top Layer w12: Q1A.3 BLOWN_LEDA.A@2449.53,4000 ; BLOWN_LEDA.A R_BLOWN1A.1
NetBLOWN_LEDB_A: BLOWN_LEDB.A Q1B.3 R_BLOWN1B.1 | length 428.9
  Top Layer w12: Q1B.3 BLOWN_LEDB.A@2444.06,3140 ; BLOWN_LEDB.A R_BLOWN1B.1
NetC16_1: C16.1 OLED1.3 | length 186.5
  Top Layer w8: C16.1 4339.69,4096.97 4391.61,4148.89 OLED1.3
NetC16_2: C16.2 OLED1.2 | length 191.4
  Top Layer w8: C16.2 4300.31,4090.31 4364.05,4154.05 OLED1.2
NetC17_1: C17.1 OLED1.5 | length 166.2
  Top Layer w8: OLED1.5 4446.73,4067.95 C17.1
NetC17_2: C17.2 OLED1.4 | length 169
  Top Layer w8: C17.2 4410.31,4115.31 4419.59,4124.59 4419.59,4229.59 OLED1.4
NetC20_2: C20.2 C21.2 OLED1.27 OLED1.28 | length 453.4
  Top Layer w8: OLED1.27 5053.03,4131.97 5090,4095 C20.2 5090.16,4074.53 C21.2@5157.87,4074.53 ; OLED1.28 5080.59,4129.41 5100,4110 5145,4110 5160,4095 C21.2
NetC23_1: C23.1 U3.6 | length 127.3
  Top Layer w12: C23.1 3745,4670 3755.47,4659.53 3755.47,4634.53 U3.6
NetC23_2: C23.2 L1.1 U3.2 | length 552.4
  Top Layer w8: L1.1@3908.23,4740 L1.1
  Top Layer w12: U3.2 3625,4530 3600,4555 3600,4637.42 3632.58,4670 C23.2 3685.31,4705.31 3720,4740 L1.1@3908.23,4740
NetC24_1: C24.1 R21.1 R22.2 U3.4 | length 421.5
  Top Layer w12: U3.4 C24.1@3924.72,4492.6 ; R22.2@3925.41,4355.41 C24.1@3925.41,4492.46 ; R22.2 R21.1
NetC24_2: C24.2 C25.2 L1.2 LDO_1.3 R21.2 | length 564.9
  Top Layer w8: LDO_1.3 LDO_1.3@4055.93,4251.37 ; R21.2 R21.2@4100,4356.06
  Top Layer w12: L1.2 C24.2 C25.2@4020,4515 ; C25.2 4059.57,4515.43 4100,4475 R21.2@4100,4356.06 ; LDO_1.3@4055.93,4251.37 4086.37,4251.37 4098.94,4263.94 R21.2
NetD_Base1A_1: D_Base1A.1 R_BaseA.2 | length 147.2
  Top Layer w8: R_BaseA.2 2139.17,4036.97 2138.25,4037.89 2136.28,4037.89 2125,4049.17 2125,4154 D_Base1A.1
NetD_Base1A_2: D_Base1A.2 Fuse1A.2 J_MTR1A.1 R_BLOWN1A.2 | length 534.2
  Top Layer w20: D_Base1A.2 2157.5,4318.5 2157.5,4342.96 2188.01,4373.46 R_BLOWN1A.2 ; R_BLOWN1A.2@2450.12,4373.35 Fuse1A.2@2630,4373.35
NetD_Base1B_1: D_Base1B.1 R_BaseB.2 | length 147.2
  Top Layer w8: R_BaseB.2 2139.17,3186.97 2138.25,3187.89 2136.28,3187.89 2125,3199.17 2125,3304 D_Base1B.1
NetD_Base1B_2: D_Base1B.2 Fuse1B.2 J_MTR1B.1 R_BLOWN1B.2 | length 535
  Top Layer w20: D_Base1B.2 2157.5,3468.5 2157.5,3492.96 2176.28,3511.73 Fuse1B.2@2635.55,3511.73
NetD_LED1_A: D_LED1.A R15.2 | length 113.7
  Top Layer w8: D_LED1.A R15.2
NetD_LED2_A: D_LED2.A R16.2 | length 108.7
  Top Layer w8: D_LED2.A R16.2
NetOLED1_26: OLED1.26 R20.2 | length 163
  Top Layer w8: R20.2@5025.47,4067.04 OLED1.26
NetQ1A_1: Q1A.1 R_BaseA.1 | length 101.7
  Top Layer w8: R_BaseA.1 2160.83,4036.48 2161.75,4037.4 Q1A.1
NetQ1B_1: Q1B.1 R_BaseB.1 | length 119.1
  Top Layer w8: R_BaseB.1 2160.83,3183.03 2161.75,3182.11 2163.72,3182.11 2168.43,3177.4 Q1B.1
NetR1_1: R1.1 R2.2 | length 68.3
  Top Layer w12: R2.2 R1.1
NetR12_1: R12.1 U1.26 | length 152.1
  Top Layer w8: U1.26 3983.74,3838.74 4010,3865 R12.1
NetR13_2: R13.2 U1.23 | length 116.8
  Top Layer w8: U1.23 4067.63,3689.37 4182.64,3689.37 R13.2
NetR17A_1: R17A.1 U2A.6 | length 77.4
  Top Layer w8: R17A.1 U2A.6@3120,3692.44
NetR17B_1: R17B.1 U2B.6 | length 65.9
  Top Layer w8: R17B.1@3123.15,2901.75 U2B.6
NRST: B_RST1.A1 B_RST1.B1 C2.2 J2.12 U1.4 | length 3053.2
  Top Layer w8: v1(3455,3480) 3455,3555 3495,3595 3600,3595 3630.37,3625.37 3742.63,3625.37 U1.4 ; B_RST1.A1 B_RST1.B1 3461.18,3023.9 C2.2@3510.31,3073.03 ; v1(3510,3180) 3510.16,3179.84 3510.16,3075.16 C2.2 ; v1(5005,3375) J2.12
  Bottom Layer w8: v1(3510,3180) 3455,3235 v1(3455,3480) 3620,3480 3765,3335 3880,3335 4095,3550 4750,3550 4925,3375 v1(5005,3375)
OLED_NRST: H_OLED1.3 OLED1.14 U1.28 | length 2044.5
  Top Layer w8: U1.28 3920.37,3772.37 3920.37,3889.63 3920,3890 3945,3915 4815,3915 ; OLED1.14 4694.88,4229.88 4694.88,4035.12 4815,3915 ; H_OLED1.3 5275,4100 5255,4080 5255,3970 5200,3915 4815,3915
OLED_TOGGLE: B_OLED1.A1 B_OLED1.B1 C8.2 H_OLED1.4 U1.27 | length 1765
  Top Layer w8: U1.27 v1(3952.24,3852.24) ; v1@4825.16,3749.84 5019.84,3749.84 C8.2 5042.83,3749.69 5086.97,3793.82 B_OLED1.A1 B_OLED1.B1 5330,3795.71 H_OLED1.4
  Bottom Layer w8: v1(3952.24,3852.24) 3969.49,3835 4220,3835 4355,3700 4745,3700 4795,3750 v1(4825,3750)
OPAMP1_VINP: pad.3 R2.1 R3.2 U1.6 | length 698.9
  Top Layer w8: U1.6@3741.88,3563.88 U1.6
  Top Layer w12: pad.3@3585,4000 v3(3670,4000) ; pad.3@3585,4040 R3.2 R2.1 ; v3(3670,3565) 3671.12,3563.88 U1.6@3741.88,3563.88
  Bottom Layer w12: v3(3670,3565) v3(3670,4000)
SPI1_MISO: H_SD1.1 MICRO_SD1.7 R7.1 U1.21 | length 1916.8
  Top Layer w8: U1.21 4189.25,3625.75 4310,3505 4310,3455 4281.54,3426.54 4281.54,3308.46 4346.73,3243.27 R7.1 4347.94,3213.79 MICRO_SD1.7 4347.94,3067.06 4390,3025 4830,3025 5045,2810 5190,2810 H_SD1.1
SPI1_MOSI: H_SD1.3 MICRO_SD1.3 R6.1 U1.22 | length 1963.8
  Top Layer w8: U1.22 4068.12,3656.12 4193.88,3656.12 4265,3585 4385,3585 4590,3380 4590,3290 4549.02,3249.02 R6.1@4525,3249.02 ; R6.1 4521.17,3246.17 MICRO_SD1.3 4521.17,3087.69 4543.86,3065 4635,3065 4745,3175 4865,3175 5170,2870 H_SD1.3
SPI1_SCK: H_SD1.2 MICRO_SD1.5 R8.1 U1.7 | length 2294.4
  Top Layer w8: v1(3675,3380) 3674.33,3380.67 3674.33,3509.33 3695.63,3530.63 3742.37,3530.63 U1.7 ; v1(4340,3310) 4400,3250 4432.39,3250 4434.56,3247.83 MICRO_SD1.5 4434.56,3090.44 4480,3045 4652.63,3045 4747.5,3139.87 4747.5,3140.27 4755.7,3148.47 4756.1,3148.47 4757.63,3150 4850,3150 5160,2840 5260,2840 H_SD1.2
  Bottom Layer w8: v1(3675,3380) 3745,3310 v1(4340,3310)
STM_Vdd: BEAD1.1 C5.2 C6.2 C7.2 LDO_1.2 LDO_1.4 U1.1 U1.17 | length 2275.2
  Top Layer w8: BEAD1.1 v1(3640,3530) ; C7.2 3645,3750 3674.76,3720.24 U1.1 U1.1@3745,3722.24 ; U1.17 4067.12,3499.88 4154.88,3499.88 v1(4155,3500) 4155,3462.37 C5.2@4152.15,3459.53 ; C5.2 C6.2
  Top Layer w12: U1.1@3745,3722.24 v3(3745,3820) 3745,3935 ; LDO_1.4 3760,4160 3745,4145 3745,3935 ; LDO_1.2 4100,4160 4135,4125 4135,4025 4110,4000 3810,4000 3745,3935
  Mid Layer 2 w12: v1(3640,3530) 3685,3530 3745,3590 ; v3(3745,3820) 3745,3590 ; v1(4155,3500) 4125,3530 3805,3530 3745,3590
SWCLK: J2.6 R4.1 U1.24 | length 1283.8
  Top Layer w8: U1.24 4125.24,3720.24 4155,3750 R4.1@4182.28,3750 ; R4.1 R4.1@4182.28,3750 ; J2.6 4925,3225 4645,3505 4550,3505 4335,3720 4195,3720 4184.13,3730.87 4184.13,3748.16 R4.1@4182.28,3750
SWDIO: J2.4 R5.1 R13.1 | length 1128.9
  Top Layer w8: R13.1 R5.1 4278.27,3651.73 4315,3615 4410,3615 4545,3480 4635,3480 4940,3175 J2.4
SWO: J2.8 R9.1 R12.2 | length 1273.2
  Top Layer w8: R12.2 R9.1 4184.12,3864.14 4184.12,3845.88 4245,3785 4265,3785 4310,3740 4345,3740 4545,3540 4645,3540 4910,3275 J2.8
Vi_motor1: C10A.2 U1.10 U2A.11 | length 1313.6
  Top Layer w8: U2A.11 3119.53,3817.91 3160,3858.39 ; C10A.2 3160,3858.39 ; U1.10 3826.26,3356.26 3805,3335 3315,3335 3230,3420 3230,3788.39 3160,3858.39
Vi_motor2: C10B.2 U1.11 U2B.11 | length 1023.3
  Top Layer w8: U2B.11 3123.15,3092.6 3165,3134.45 ; C10B.2 3165,3134.45 ; U1.11 3857.76,3357.76 3805,3305 3545,3305 3335,3095 3204.45,3095 3165,3134.45
Vmotor1: Fuse1A.1 U2A.3 | length 61.5
  Top Layer w8: U2A.3@3041.06,3730 U2A.3
  Top Layer w25: 2980,3730 U2A.3@3041.06,3730
Vmotor2: Fuse1B.1 U2B.3 | length 55
  Top Layer w25: 2990,3005 U2B.3
pads on no net: Fuse1A. Fuse1B. J1_PWR. J2.1 J2.2 J2.9 J2.10 J_MTR1A. J_MTR1B. MICRO_SD1. MICRO_SD1.1 MICRO_SD1.8 OLED1.7 OLED1.21 OLED1.22 OLED1.23 OLED1.24 OLED1.25 U1.12 U1.13 U1.18 U2A.7 U2A.8 U2A.9 U2A.10 U2B.7 U2B.8 U2B.9 U2B.10
copper on no net: | length 5936.9
  Top Layer w39.37: 1928.74,2655 ccw(c1850,2655) 1928.74,2655 ; 1928.74,4850 ccw(c1850,4850) 1928.74,4850 ; 3243.74,2655 ccw(c3165,2655) 3243.74,2655 ; 3518.74,4850 ccw(c3440,4850) 3518.74,4850 ; 5158.74,2655 ccw(c5080,2655) 5158.74,2655 ; 5328.74,4525 ccw(c5250,4525) 5328.74,4525
  Bottom Layer w39.37: 1928.74,2655 ccw(c1850,2655) 1928.74,2655 ; 1928.74,4850 ccw(c1850,4850) 1928.74,4850 ; 3243.74,2655 ccw(c3165,2655) 3243.74,2655 ; 3518.74,4850 ccw(c3440,4850) 3518.74,4850 ; 5158.74,2655 ccw(c5080,2655) 5158.74,2655 ; 5328.74,4525 ccw(c5250,4525) 5328.74,4525

## Polygon pours and split planes (outlines as drawn)
26V1 on Top Layer "26V1_L01_P006" (solid, pour order 6): 2840,3260 3010,3260 3010,3060 2840,3060
26V1 on Top Layer "26V1_L01_P005" (solid, pour order 5): 2835,4005 3010,4005 3010,3790 2835,3790
NetD_Base1A_2 on Top Layer "NETD_BASE1A_2_L01_P012" (solid, pour order 12): 2560,4590 2800,4590 2800,4290 2560,4290
Vmotor1 on Top Layer "VMOTOR1_L01_P007" (solid, pour order 7): 2560,4230 2800,4230 2800,3805 2860,3745 3005,3745 2964.62,3670 2736.54,3670 2560,3823
Vmotor2 on Top Layer "VMOTOR2_L01_P010" (solid, pour order 10): 2565,2925 2565,3235 2805,3235 2805,3060 2845,3020 3004.72,3020 2973.64,2925
26V1 on Top Layer "26V1_L01_P003" (solid, pour order 3): 3400,4580 3539.68,4580 3600,4505 3600,4480 3551.43,4431.43 3544.44,4400 3400,4400
NetD_Base1B_2 on Top Layer "NETD_BASE1B_2_L01_P011" (solid, pour order 11): 2565,3590 2805,3590 2805,3290 2565,3290
3V3 on Mid Layer 2 "3V3_L03_P023" (solid, pour order 23): 3810,3670 3860,3610 4165,3610 4233.38,3910 4565,3910 4565,4120 4985,4120 4985,3901.17 4600,3696.17 4600,3165 4233.38,3165 4220,3440 3450,3445 3450,3360 3360,3360 3360,3761.67 3290,3802.5 3290,3865 3775.77,3865 3810,3824.01
26V1 on Mid Layer 2 "26V1_L03_P004" (solid, pour order 4): 3545,4580 3545,4400 3275,4400 3225,4350 3220,3175 3084.35,3055 2840,3055 2840,3270 3024,3270 3090,3320.77 3090,3585 3090,3670 3090,3790 2835,3790 2835,4010 3013.03,4010 3065.88,4045.74 3065.88,4660 3258.12,4660
NetD_Base1B_2 on Mid Layer 2 "NETD_BASE1B_2_L03_P014" (solid, pour order 14): 2805,3585 2805,3290 2356.56,3290 2205,3171.71 2205,2835 2065,2835 2065,3266.6 2267.5,3447.5 2547.72,3585
NetD_Base1A_2 on Mid Layer 2 "NETD_BASE1A_2_L03_P015" (solid, pour order 15): 2795.26,4295 2607.5,4295 2506.86,4345.32 2170,4350 2075,4445 2075,4665 2205,4665 2205,4496.25 2235,4470 2450,4470 2597.45,4590 2794.75,4590
GND on Mid Layer 1 "GND_L02_P000" (solid, pour order 0): 1720,5000 5415,5000 5415,2500 1720,2500

## Silkscreen, mask and mechanical layers (free items; w line width, h text height)
Top Overlay:
  text "Autonomous  / Robotic Vehicle / U of M" at 2345,4710 h40
  text "SOLDER  / IF <5A  / ONLY!  / ------->" at 3240,3990 h40
  text "TGL  RST  SCL  SDA" at 5290,3970 h20 r90
  text "GND  3v3  SCL  SDA" at 4340,3735 h20
  text "Maverick / _\__/_ / [_•_•_] / /|____|\ / |   |" at 1807.54,3570 h40
  text "GND  3v3  SCL  SDA" at 5280,2640 h20 r90
  text "Power Distro Board  / V1.0" at 2325.07,2565 h40
Mechanical 1:
  the board outline again, w10

## Text inside footprints (layer, text, board x,y; h text height)
C24: Mechanical 13 "*" at 3769.5,3710.98 h50
OLED1: Top Overlay "OLED_128X64" at 4637.1,4889.32 h20; Top Overlay "30" at 5099.49,4307.15 h20; Top Overlay "1" at 4332.56,4296.92 h20
U1: Top Overlay "*" at 3685,3775 h50